# EAGLE board USB_Host (EAGLE 4.16)
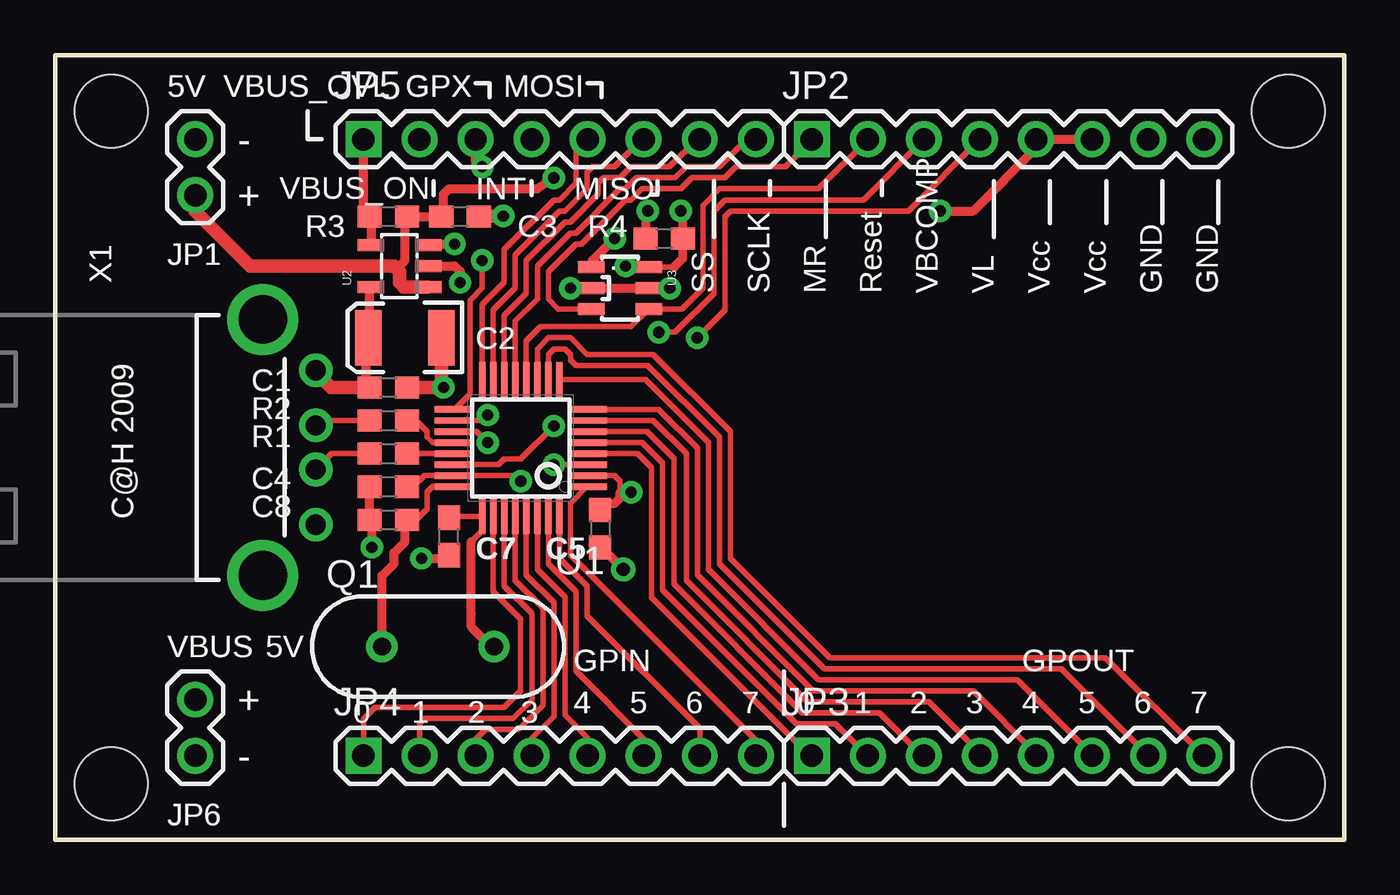
[diagram p0: board, top side]
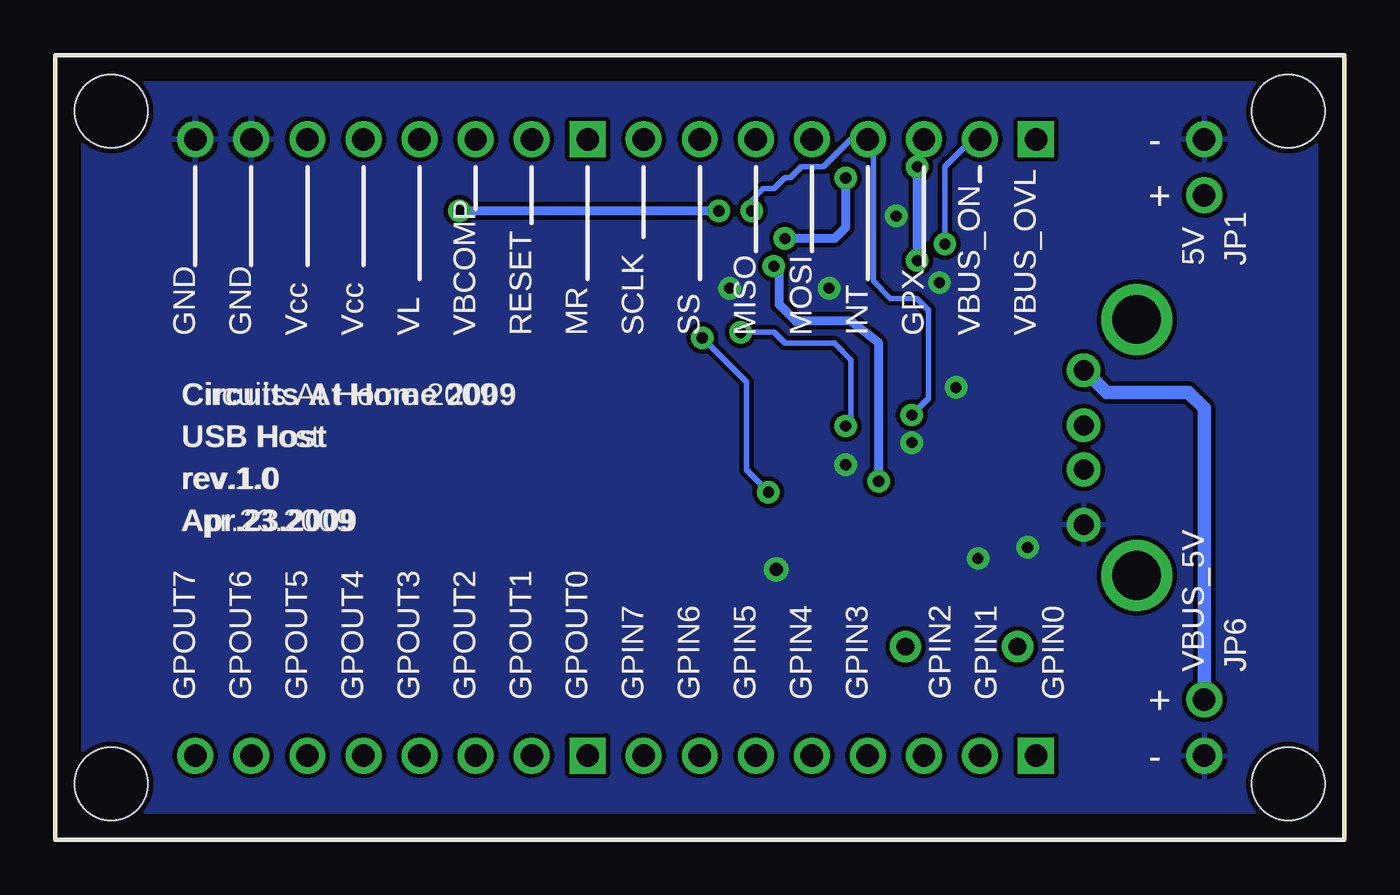
[diagram p1: board, bottom side, seen from below]

Size 58.42 x 35.56 mm. Coordinates in mm from the lower left corner, seen from the top.
Outline: 0,0 58.42,0 58.42,35.56 0,35.56 0,0
Copper layers (1*16): Top 0.035mm / dielectric 1.5mm / Bottom 0.035mm
Design rules "default": minimum track width 8mil, minimum drill 20mil, track to track 8mil, track to pad 8mil, pad to pad 8mil, via to via 8mil, smd to smd 8mil, copper to edge 10mil, drill to drill 8mil, minimum pad ring 12mil, minimum via ring 10mil, stop-mask expansion 4mil, vias tented up to drill 25mil, thermal gap 10mil

## Footprints (pad centres in the part's own frame; a part is rotated, then mirrored left to right if it is on the bottom)
0603 = smd 1.1 x 1: 1 -0.85,0; 2 0.85,0
EIA3528 = smd 1.2 x 2.5: A 1.65,0; C -1.65,0
1X02 = drill 1.016 round: 1 0,0; 2 2.54,0
1X08 = drill 1.016 square: 1 0,0 | drill 1.016 round: 2 2.54,0; 3 5.08,0; 4 7.62,0; 5 10.16,0; 6 12.7,0; 7 15.24,0; 8 17.78,0
HC49US = drill 0.813 round: 1 -2.54,0; 2 2.54,0
TQFP32_8MIL = smd 0.294 x 1.6: 1 -1.75,-3.1; 2 -1.25,-3.1; 3 -0.75,-3.1; 4 -0.25,-3.1; 5 0.25,-3.1; 6 0.75,-3.1; 7 1.25,-3.1; 8 1.75,-3.1; 17 1.75,3.1; 18 1.25,3.1; 19 0.75,3.1; 20 0.25,3.1; 21 -0.25,3.1; 22 -0.75,3.1; 23 -1.25,3.1; 24 -1.75,3.1 | smd 1.6 x 0.294: 9 3.1,-1.75; 10 3.1,-1.25; 11 3.1,-0.75; 12 3.1,-0.25; 13 3.1,0.25; 14 3.1,0.75; 15 3.1,1.25; 16 3.1,1.75; 25 -3.1,1.75; 26 -3.1,1.25; 27 -3.1,0.75; 28 -3.1,0.25; 29 -3.1,-0.25; 30 -3.1,-0.75; 31 -3.1,-1.25; 32 -3.1,-1.75
SOT23-5 = smd 0.55 x 1.2: 1 -0.95,-1.3; 2 0,-1.3; 3 0.95,-1.3; 4 0.95,1.3; 5 -0.95,1.3
SOT23-6 = smd 0.55 x 1.2: 1 -0.95,-1.3; 2 0,-1.3; 3 0.95,-1.3; 4 0.95,1.3; 5 0,1.3; 6 -0.95,1.3
STAND-OFF = hole 3.302: 0,0
USB-A-H = drill 0.914 round: 1 2.4,3.5; 2 2.4,1; 3 2.4,-1; 4 2.4,-3.5 | drill 2.2 round: GND@1 0,5.8; GND@2 0,-5.8

## Placement (x,y rotation side)
C1  0.1uF  [0603]  15.1,20.5 0 top
C2  4.7uF  [EIA3528]  15.85,22.75 180 top
C3  0.1uF  [0603]  18.35,28.25 0 top
C4  1.0uF  [0603]  15.1,16 180 top
C5  0.1uF  [0603]  24.7,14.1 270 top
C7  18pF  [0603]  17.85,13.75 90 top
C8  18pF  [0603]  15.1,14.5 0 top
JP1  5V  [1X02]  6.35,31.75 270 top
JP2  [1X08]  34.29,31.75 0 top
JP3  [1X08]  34.29,3.81 0 top
JP4  [1X08]  13.97,3.81 0 top
JP5  [1X08]  13.97,31.75 0 top
JP6  VBUS_5V  [1X02]  6.35,6.35 270 top
Q1  12MHz  [HC49US]  17.35,8.75 0 top
R1  33 1%  [0603]  15.1,17.5 0 top
R2  33 1%  [0603]  15.1,19 0 top
R3  10K  [0603]  15.1,28.25 0 top
R4  2.2K  [0603]  27.6,27.25 0 top
U1  MAX3421E  [TQFP32_8MIL]  21.1,17.75 90 top
U2  MAX4793  [SOT23-5]  15.6,26 90 top
U3  MAX6349  [SOT23-6]  25.6,25 270 top
U$1  STAND-OFF  [STAND-OFF]  2.54,2.54 0 top
U$5  STAND-OFF  [STAND-OFF]  55.88,2.54 0 top
U$6  STAND-OFF  [STAND-OFF]  2.54,33.02 0 top
U$7  STAND-OFF  [STAND-OFF]  55.88,33.02 0 top
X1  USB-A-H  [USB-A-H]  9.41,17.78 0 top

## Library data of the parts
C1-C5 C7 C8 Q1 R1-R4 = CH_passive
JP1-JP6 X1 = CH_connectors
U1-U3 = CH_Maxim
U$1 U$5-U$7 = SparkFun

## Nets
5V: C3.1 JP1.2 R3.2 U2.1 U3.1
GND: C1.2 C2.C C3.2 C4.2 C5.2 C7.1 C8.1 JP1.1 JP2.7 JP2.8 JP6.2 U1.3 U1.19 U2.2 U3.2 U3.5 X1.4
GPIN0: JP4.1 U1.26
GPIN1: JP4.2 U1.27
GPIN2: JP4.3 U1.28
GPIN3: JP4.4 U1.29
GPIN4: JP4.5 U1.30
GPIN5: JP4.6 U1.31
GPIN6: JP4.7 U1.32
GPIN7: JP4.8 U1.1
GPOUT0: JP3.1 U1.4
GPOUT1: JP3.2 U1.5
GPOUT2: JP3.3 U1.6
GPOUT3: JP3.4 U1.7
GPOUT4: JP3.5 U1.8
GPOUT5: JP3.6 U1.9
GPOUT6: JP3.7 U1.10
GPOUT7: JP3.8 U1.11
GPX: JP5.3 U1.17
INT: JP5.4 R4.1 U1.18
MISO: JP5.6 U1.15
MOSI: JP5.5 U1.16
MR: JP2.1 U3.3
N$1: R1.2 U1.21
N$2: R2.2 U1.20
N$4: R1.1 X1.3
N$5: R2.1 X1.2
N$6: C7.2 Q1.2 U1.25
N$7: C8.2 Q1.1 U1.24
RESET: JP2.2 U1.12 U3.4
SCLK: JP5.8 U1.13
SS: JP5.7 U1.14
VBCOMP: JP2.3 U1.22
VBUS_5V: C1.1 C2.A JP6.1 U2.5 X1.1
VBUS_ON: JP5.2 U2.3
VBUS_OVL: JP5.1 R3.1 U2.4
VCC: C4.1 JP2.5 JP2.6 R4.2 U1.23 U3.6
VL: C5.1 JP2.4 U1.2

## Tracks (layer width: path | path; a pad name or v marks a point on that pad's centre or on a via)
5V  (via drill 0.51)
  Top 0.254: 15.6,25.25 15.8,25.05 | 15.85,28.15 R3.2
  Top 0.406: 15.85,28.15 15.85,26.25 15.47,25.88 | 15.85,28.25 R3.2 C3.1 17.6,28.25 17.6,29.25 17.85,29.5 21.85,29.5 v22.6,30 | U3.1 | 24.35,26 | 24.35,26 U3.1 | v25.35,27.25 24.35,26.25 24.35,26
  Top 0.61: 15.8,25.05 U2.1 | 15.6,25.25 15.6,25.75 15.47,25.88 15.35,26 8.83,26 6.35,28.48 JP1.2
  Bottom 0.406: v22.6,30 22.6,27.75 23.1,27.25 v25.35,27.25
GND  (via drill 0.51, 0.6)
  Top 0.254: 17.85,12.75 C7.1 | v22.6,17 U1.3 | 17.5,20.6 v17.6,20.5 | v19.6,18 19.1,18.5 U1.19 | 27.1,25 U3.5 26.85,25 | C3.2 19.22,28.27 | C5.2 24.75,13.25
  Top 0.406: 14.35,14.5 v14.35,13.25 | v16.6,12.75 17.85,12.75 | v18.35,25.25 18.35,25.75 18.1,26 U2.2 | v23.35,25 U3.2 26.85,25 v27.85,25 | C8.1 C4.2 | 24.75,13.25 v25.75,12.25
  Top 0.61: C8.1 14.35,14.5 14.25,14.6 | C2.C 17.5,20.6 | v17.6,20.5 C1.2 | 19.22,28.27 v20.31,28.27
  pour Bottom: 1.27,34.29 1.27,1.27 57.15,1.27 57.15,34.29
GPIN0
  Top 0.254: U1.26 19.85,11.25 21.1,10 21.1,6.75 20.35,6 14.6,6 14.5,6 13.97,5.47 JP4.1
GPIN1
  Top 0.254: U1.27 20.35,11.5 21.6,10.25 21.6,6.35 20.75,5.5 16.85,5.5 16.75,5.5 16.51,5.26 JP4.2
GPIN2
  Top 0.254: U1.28 20.85,11.75 22.1,10.5 22.1,6.1 21,5 19.5,5 19.05,4.55 JP4.3
GPIN3
  Top 0.254: U1.29 21.35,12 22.6,10.75 22.6,5.75 22.6,5.6 21.59,4.59 JP4.4
GPIN4
  Top 0.254: U1.30 21.85,12.25 23.1,11 23.1,5.75 23.1,5.65 24.13,4.62 JP4.5
GPIN5
  Top 0.254: U1.31 22.35,12.5 23.6,11.25 23.6,7.75 23.6,7.65 26.67,4.58 JP4.6
GPIN6
  Top 0.254: U1.32 22.85,12.75 24.1,11.5 24.1,10.25 24.1,10.15 29.21,5.04 JP4.7
GPIN7
  Top 0.254: U1.1 24.1,16 23.35,15.25 23.35,13 23.35,12.9 31.75,4.5 JP4.8
GPOUT0
  Top 0.254: U1.4 26.39,17.5 27.03,16.87 27.03,10.97 34.25,3.75 34.29,3.79 JP3.1
GPOUT1
  Top 0.254: 36.8,3.8 35.35,5.25 33.6,5.25 27.53,11.32 27.53,17.07 26.6,18 U1.5 | 36.8,3.8 36.85,3.75 | 36.8,3.8 36.75,3.75 | JP3.2 36.81,3.81 36.8,3.8
GPOUT2
  Top 0.203: 27.13,18.19 26.92,18.39 | 33.73,5.89 33.73,5.79 33.85,5.75 | 24.99,18.49 U1.6
  Top 0.254: 33.85,5.75 37.35,5.75 39.35,3.75 39.37,3.77 39.27,3.77 | 24.99,18.49 26.82,18.49 27.13,18.19 28.04,17.27 28.04,11.58 33.73,5.89 | 39.27,3.77 39.31,3.81 JP3.3 | 39.27,3.77 39.25,3.75
GPOUT3
  Top 0.254: U1.7 27.1,19 28.6,17.5 28.6,11.75 34.1,6.25 39.6,6.25 41.91,3.94 41.91,3.84 41.94,3.81 | 41.94,3.81 JP3.4 | 41.94,3.81 42,3.75
GPOUT4
  Top 0.254: U1.8 27.35,19.5 29.1,17.75 29.1,12 34.35,6.75 41.6,6.75 44.45,3.9 JP3.5 44.5,3.75
GPOUT5
  Top 0.254: U1.9 26.75,20.85 29.6,18 29.6,12.25 34.6,7.25 43.6,7.25 47.04,3.81 | 47.04,3.81 47.1,3.75 | JP3.6 46.99,3.76 47,3.75 47.04,3.79 47.04,3.81
GPOUT6
  Top 0.254: U1.10 22.35,22 22.6,22.25 23.1,22.25 23.35,22 23.35,21.75 23.6,21.5 26.85,21.5 30.1,18.25 30.1,12.5 34.85,7.75 45.6,7.75 JP3.7 | JP3.7 49.6,3.75 | 49.53,3.78 49.5,3.75 | 49.53,3.78 JP3.7 | JP3.7 49.54,3.79 49.53,3.78
GPOUT7
  Top 0.254: U1.11 21.85,22.25 22.35,22.75 23.35,22.75 24.1,22 27.1,22 30.6,18.5 30.6,12.75 35.1,8.25 47.6,8.25 52.07,3.78 | 52.07,3.78 52.1,3.75 | 52.03,3.78 JP3.8 | 52.07,3.78 52.03,3.78 | 52.03,3.78 52,3.75
GPX  (via drill 0.51)
  Top 0.254: U1.17 18.1,19.5 18.8,20.2 18.8,24.45 19.35,25 v19.35,26.25
  Top 0.406: JP5.3 19.05,30.8 v19.35,30.5
  Bottom 0.406: v19.35,26.25 v19.35,30.5
INT  (via drill 0.51)
  Top 0.254: v19.6,19.25 19.35,19 U1.18
  Top 0.406: R4.1 26.75,28.4 v26.85,28.5
  Bottom 0.254: v19.6,19.25 18.85,20 18.85,24 19.37,24.52 20.56,24.52 21.35,25.31 21.35,31.5 JP5.4 | JP5.4 | JP5.4 22.35,31.75 23.6,30.5 24.6,30.5 25.1,30 25.35,30 25.85,29.5 26.35,29.5 26.85,29 v26.85,28.5
MISO
  Top 0.254: U1.15 19.85,24 20.85,25 20.85,26.5 22.85,28.5 23.1,28.5 24.1,29.5 24.1,30.25 24.35,30.5 25.35,30.5 26.6,31.75 JP5.6
MOSI
  Top 0.254: U1.16 19.35,24.25 20.35,25.25 20.35,26.75 22.6,29 22.85,29 23.6,29.75 23.6,31.25 24.1,31.75 JP5.5
MR
  Top 0.254: U3.3 22.8,24.05 22.35,24.5 22.35,25.75 23.6,27 23.85,27 25.85,29 26.1,29 26.6,29.5 28.35,29.5 28.85,30 30.35,30 30.85,30.5 33.1,30.5 34.35,31.75 JP2.1
N$1
  Top 0.254: 15.85,17.5 R1.2 U1.21
N$2
  Top 0.203: 16.85,18.25 17.1,18 | R2.2 16.35,19
  Top 0.254: 17.1,18 U1.20 | 16.85,18.25 16.85,18.5 16.35,19
N$4
  Top 0.254: X1.3 12.53,17.5 R1.1
N$5
  Top 0.254: X1.2 12.03,19 R2.1
N$6
  Top 0.254: C7.2 17.85,14.5 18,14.65 U1.25 19.35,14 18.85,13.5
  Top 0.406: 18.85,13.5 18.85,10.25 18.85,9.65 19.75,8.75 Q1.2
N$7
  Top 0.203: C8.2 16.35,14.5
  Top 0.254: U1.24 17.1,16 16.85,15.75 16.85,15 16.35,14.5 | Q1.1 14.75,8.75 14.81,8.81
  Top 0.406: C8.2 15.85,14.5 15.85,13.5 15.35,13 15.35,12.5 14.81,11.96 14.81,8.81
RESET
  Top 0.203: JP2.2 36.88,31.8 36.85,31.75
  Top 0.254: U3.4 | U3.4 26.1,23.25 22,23.25 21.35,22.6 U1.12 | U3.4 28.4,24.05 29.35,25 29.35,28.75 30.1,29.5 34.6,29.5 36.85,31.75
SCLK
  Top 0.254: U1.13 20.85,23.5 21.85,24.5 21.85,26 23.35,27.5 23.6,27.5 25.6,29.5 25.85,29.5 26.35,30 28.1,30 28.6,30.5 30.1,30.5 31.35,31.75 JP5.8
SS
  Top 0.254: U1.14 20.35,23.75 21.35,24.75 21.35,26.25 23.1,28 23.35,28 24.6,29.25 24.6,29.75 24.85,30 25.6,30 26.1,30.5 27.85,30.5 29.1,31.75 JP5.7
VBCOMP  (via drill 0.51)
  Top 0.254: U1.22 20.1,17 20.35,17.25 21.1,17.25 v22.6,18.75 | JP2.3 36.62,29 30.35,29 29.85,28.5 29.85,24.75 28.1,23 v27.35,23
  Bottom 0.254: v27.35,23 25.85,23 25.35,22.5 23.1,22.5 22.35,21.75 22.35,18.98 22.58,18.75 v22.6,18.75
VBUS_5V
  Top 0.254: 14.1,22.75 14.3,22.95 | 13.1,20.5 13.08,20.5
  Top 0.406: 14.1,20.5 14.1,22.75 C2.A 14.25,22.75 14.25,25 U2.5
  Top 0.61: C1.1 14.1,20.5 13.1,20.5 12.5,20.5 11.75,21.25 11.78,21.28 X1.1
  Bottom 0.203: 11.78,21.28 X1.1 | 10.56,20.27 10.77,20.27
  Bottom 0.61: 10.56,20.27 7.06,20.27 6.35,19.56 JP6.1 | 10.77,20.27 11.78,21.28
VBUS_ON  (via drill 0.51)
  Top 0.406: U2.3 17.3,26.95 17.35,27 v18.1,27
  Bottom 0.254: v18.1,27 18.1,30.5 16.83,31.77 16.53,31.77 JP5.2
VBUS_OVL
  Top 0.406: U2.4 14.35,27 14.35,28.15 | R3.1 14.35,28.25 13.97,28.63 JP5.1
  Top 0.61: 14.35,28.15 R3.1 | 14.35,27
VCC  (via drill 0.51)
  Top 0.254: 20.85,16.5 v21.1,16.25 20.75,16.25 20.75,16.5 U1.23 16.75,16.5 16.5,16.25 16.25,16.25 16,16 C4.1 | U3.6 26.95,25.95 27,26 27.05,25.95 28.05,25.95
  Top 0.406: 28.05,25.95 28.45,26.35 R4.2 28.45,28.4 v28.35,28.5 | JP2.5 44.35,31.75 | JP2.5 JP2.6 | JP2.5 44.45,31.35 41.6,28.5 v40.1,28.5 | U3.6 26.85,26 v25.85,26
  Bottom 0.203: 28.85,28.5 28.85,28.55 v28.35,28.5
  Bottom 0.406: 28.45,28.5 28.85,28.5 v40.1,28.5 | v25.85,26 25.6,25.75 25.6,24.25 24.85,23.5 22.35,23.5 21.1,22.5 v21.1,16.25
VL  (via drill 0.51)
  Top 0.254: U1.2 25.35,16.5 25.6,16.25 25.6,15.75 v26.1,15.75 | 24.85,15.25 24.7,15.1 24.7,15.05 24.75,15 C5.1 | JP2.4 38.66,28.5 30.6,28.5 30.35,28.25 30.35,24 v29.1,22.75
  Top 0.406: 25.6,15.75 25.6,15.5 25.35,15.25 24.85,15.25
  Bottom 0.254: v26.1,15.75 27.1,16.75 27.1,20.75 v29.1,22.75

## Text on the board
tNames: 5V | VBUS_OVL | GPX | MOSI | - | + | VBUS_ON | INT | MISO | . | SS | SCLK | MR | Reset | VBCOMP | VL | Vcc | Vcc | GND | GND | C@H 2009 | . | VBUS | 5V | GPIN | GPOUT | + | 4 | 5 | 6 | 7 | 0 | 1 | 2 | 3 | 4 | 5 | 6 | 7 | 0 | 1 | 2 | 3 | -
bNames: - | + | JP1 | 5V | VBUS_OVL | VBUS_ON | GPX | INT | MOSI | MISO | SS | SCLK | MR | RESET | VBCOMP | VL | Vcc | Vcc | GND | GND | Circuits At Home 2009 | USB Host | rev.1.0 | Apr.23.2009 | JP6 | VBUS_5V | + | GPIN0 | GPIN1 | GPIN2 | GPIN3 | GPIN4 | GPIN5 | GPIN6 | GPIN7 | GPOUT0 | GPOUT1 | GPOUT2 | GPOUT3 | GPOUT4 | GPOUT5 | GPOUT6 | GPOUT7 | -
_tsilk: 5V | VBUS_OVL | GPX | MOSI | - | + | VBUS_ON | INT | MISO | R3 | C3 | R4 | JP1 | . | X1 | SS | SCLK | MR | Reset | VBCOMP | VL | Vcc | Vcc | GND | GND | C@H 2009 | C2 | C1 | R2 | R1 | C4 | . | C8 | C7 | C5 | VBUS | 5V | GPIN | GPOUT | + | 4 | 5 | 6 | 7 | 0 | 1 | 2 | 3 | 4 | 5 | 6 | 7 | 0 | 1 | 2 | 3 | - | JP6
_bsilk: - | + | JP1 | 5V | VBUS_OVL | VBUS_ON | GPX | INT | MOSI | MISO | SS | SCLK | MR | RESET | VBCOMP | VL | Vcc | Vcc | GND | GND | Circuits At Home 2009 | USB Host | rev.1.0 | Apr.23.2009 | JP6 | VBUS_5V | + | GPIN0 | GPIN1 | GPIN2 | GPIN3 | GPIN4 | GPIN5 | GPIN6 | GPIN7 | GPOUT0 | GPOUT1 | GPOUT2 | GPOUT3 | GPOUT4 | GPOUT5 | GPOUT6 | GPOUT7 | -